# Altium PCB Led_Circuit.PcbDoc
Units mm, origin at the board's own origin, x right, y up, seen from the top; angles counter-clockwise.
Board outline 31.37 x 14.99 mm, 2 copper layers (Top Layer, Bottom Layer); 6 components, 6 nets, 16 pads, 3 vias.
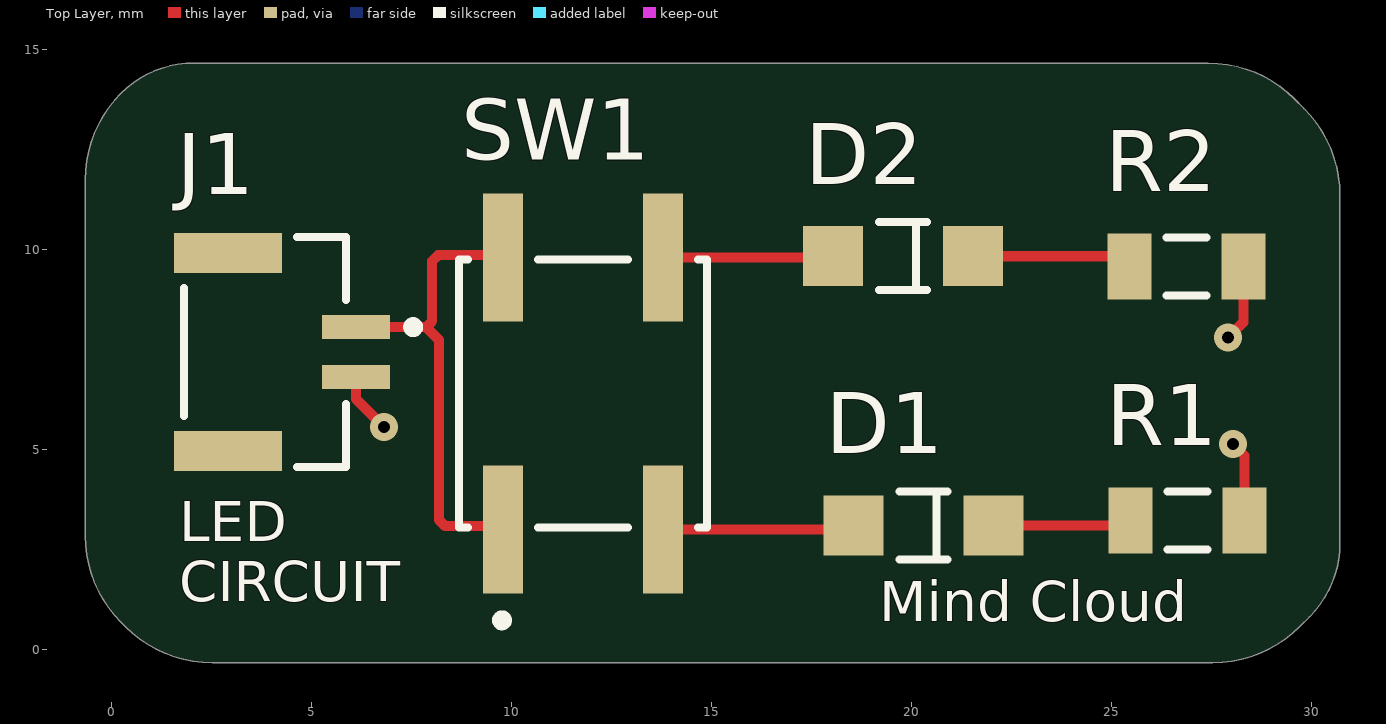
[diagram p0: Top Layer view]
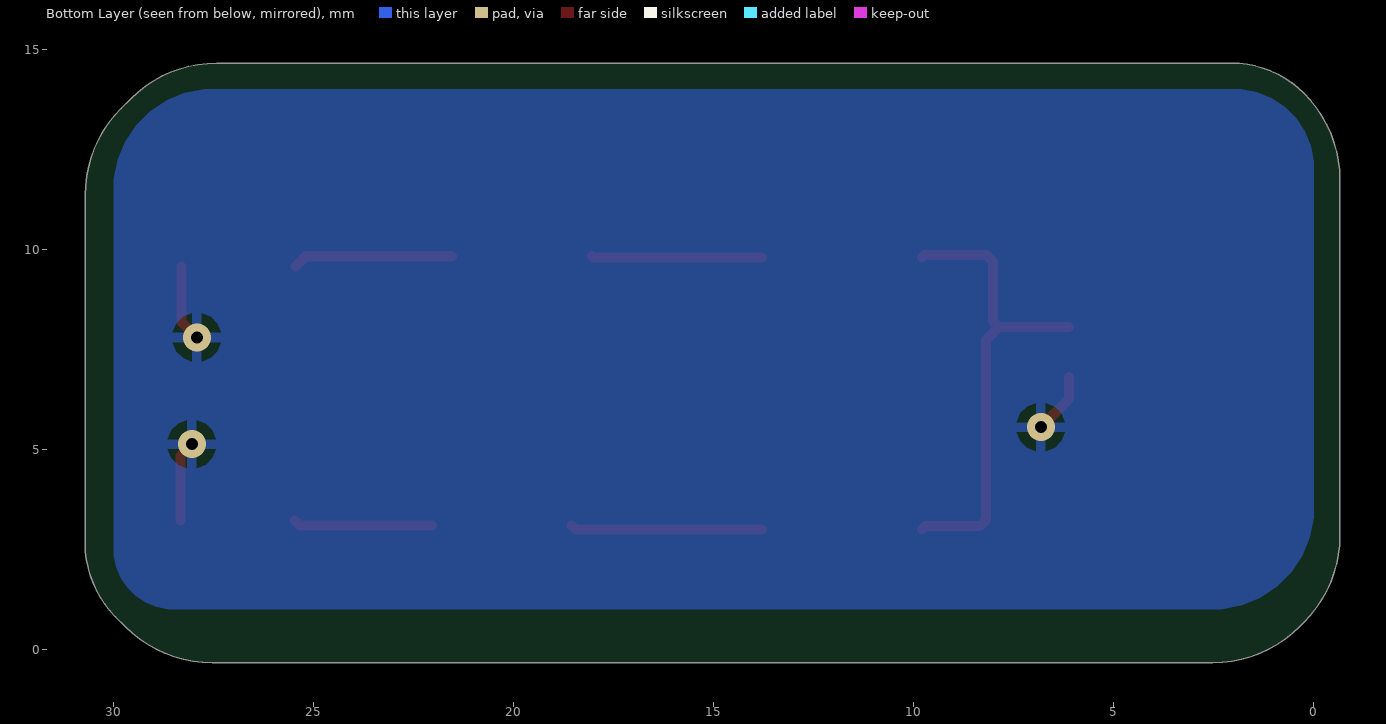
[diagram p1: Bottom Layer view, seen from below]
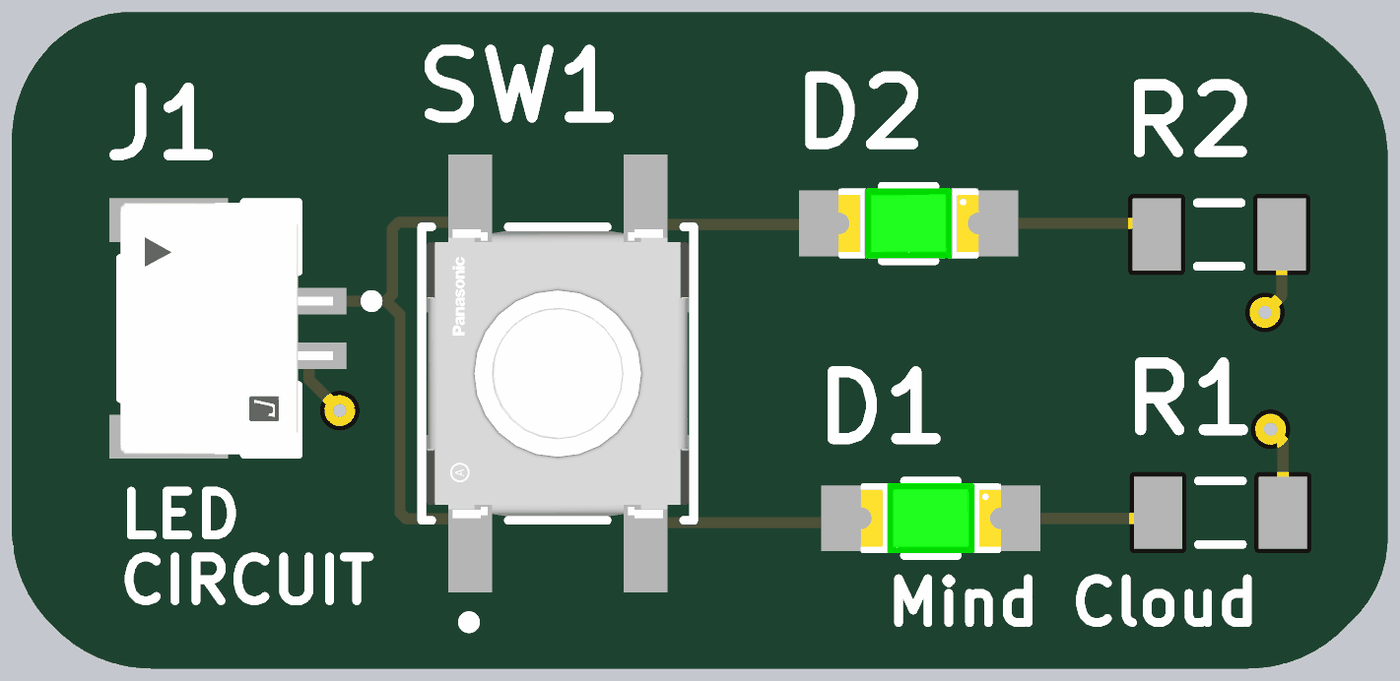
[diagram p2: 3D render of the assembled board from above, using the file's embedded part models]

## Layer stack, top to bottom
Top Solder: solder mask 0.0102, Solder Resist, Dk 3.5
Top Layer: signal copper 0.0356
Dielectric 1: dielectric 0.32, FR-4, Dk 4.8
Bottom Layer: signal copper 0.0356
Bottom Solder: solder mask 0.0102, Solder Resist, Dk 3.5

## Board outline
-0.65,2.838 ccw(c2.416,2.838) 0.248,0.67 0.357,0.561 ccw(c2.525,2.729) 2.525,-0.337 27.544,-0.337 ccw(c27.544,2.729) 29.712,0.561 29.957,0.806 ccw(c28.117,2.646) 30.719,2.646 30.719,11.347 ccw(c27.653,11.347) 29.821,13.515 29.576,13.76 ccw(c27.43,11.614) 27.43,14.649 2.066,14.649 ccw(c2.066,12.078) 0.248,13.896 ccw(c2.416,11.728) -0.65,11.728

## Design rules (kind name [scope] priority, off if disabled: settings)
Clearance [All] p1: gap=0.254 ignorepadtopadclearanceinfootprint=FALSE
PolygonConnect [All] p1: connectstyle=Relief reliefconductorwidth=0.254 reliefentries=4 polygonreliefangle="90 Angle" airgapwidth=0.254
RoutingVias [All] p1: holewidth=0.711 width=1.27 viastyle="Through Hole" minholewidth=0.711 minwidth=1.27 maxholewidth=0.711 maxwidth=1.27
SolderMaskExpansion [All] p1: expansion=0.102 istentingtop=FALSE
SupplyNets "Schematic Supply Nets_1" [InNet('GND')] p1: voltage=0.000
SupplyNets "Schematic Supply Nets" [InNet('+5')] p2: voltage=0.000
Width [All] p1: maxlimit=0.254 minlimit=0.254 preferedwidth=0.254
30 further rules are at their usual default settings.

## Components (designator, comment, footprint, x,y, rotation, side; value= is the part's Value field where it differs from the comment)
D1 "HSMG-C150" FP-HSMG-C150-MFG 20.305,3.092 r180 top
D2 "HSMG-C150" FP-HSMG-C150-MFG 19.797,9.823 r180 top
J1 "SM02B-GHS-TB(LF)(SN)" FP-SM02B-GHS-TB_LF_SN-MFG 3.85,7.425 r270 top
R1 "ERJ8CWFR018V" RESC3216X70X50NL05T20 26.909,3.219 r180 top value=220
R2 "ERJ8CWFR018V" RESC3216X70X50NL05T20 26.881,9.569 r180 top value=220
SW1 "EVQ-Q2P03W" FP-EVQ-Q2P03W-MFG 11.796,6.394 r90 top

## Footprints (in the part's own frame and the unit in brackets; to place one, negate y for a bottom-side part, rotate by r counter-clockwise, add the part's x,y. Pads: shape width x height; smd on the part's side, far side on the other; paste and mask are expansions set on the pad)
FP-EVQ-Q2P03W-MFG [mm]
  rect 3.2x1 smd paste+0 mask+0: A(-3.4,2) A'(3.4,2) B(-3.4,-2) B'(3.4,-2)
  silkscreen extent -5.8,-3.1 3.35,3.1, body extent -5.1,-3.2 5.1,3.2, height 0.25
FP-HSMG-C150-MFG [mm]
  rect 1.5x1.5 smd paste+0 mask+0: 1(-1.75,0) 2(1.75,0)
  silkscreen extent -0.6,-0.85 0.6,0.85, body extent -2.6,-0.95 2.6,0.95, height 0.25
FP-SM02B-GHS-TB_LF_SN-MFG [mm]
  rect 0.6x1.7 smd paste+0 mask+0: 1(-0.625,2.275) 2(0.625,2.275)
  rect 1x2.7 smd paste+0 mask+0: 3(-2.475,-0.925) 4(2.475,-0.925)
  silkscreen extent -2.88,-2.02 2.88,3.83, body extent -3.08,-2.37 3.08,3.22, height 0.25
RESC3216X70X50NL05T20 [mm] "Chip Resistor, 2-Leads, Body 3.20x1.60mm, IPC Medium Density"
  rect 1.1x1.65 smd: 1(-1.425,0) 2(1.425,0)
  silkscreen extent -0.5,-0.72 0.5,0.72, body extent -1.63,-0.82 1.62,0.82, height 0.7

## Part data
D1 D2: library part CMP-2000-05061-2, "LED GREEN DIFFUSED 1206 SMD", Colour=Green, Forward Current=20mA, Forward Voltage=2.2V, Manufacturer=Broadcom, Max Junction Temp=+95°C, Power Dissipation=65mW, Reverse Voltage=5V, Temperature="-40°C to +85°C", Temperature Range High=+85°C, Temperature Range Low=-40°C, Automotive=No, Category=Diode, ComponentLink2Description=Datasheet, ComponentLink2URL=https://docs.broadcom.com/docs/AV02-0551EN, Device Class L1=Optoelectronics, Device Class L2=LEDs, Device Class L3=unset, Digikey Description="LED GREEN DIFFUSED 1206 SMD", Height=1.2mm, Ipc Land Pattern Name=DIOCP320160X55, Lead Free=Yes, Led Orientation="Top View", Luminous Intensity=15mcd, Manufacturer Part Number=HSMG-C150, Mouser Description="LED Uni-Color Green 570nm 2-Pin Chip LED T/R", Octopart=https://octopart.com/hsmg-c150-broadcom-71131304, Package=HSMG-C150, Peak Emmision Wavelength=570nm, RoHS=TRUE, Viewing Angle=170°, Wavelength=572nm
J1: library part CMP-2000-07076-2, "CONN HEADER SMD R/A 2POS 1.25MM", Color=Natural, Current Rating=1A, Package Quantity=2500, Voltage Rating=50V, Connector Type="Outer Shroud Contact", Contact Material=Bronze, Contact Plating=Tin, Contact Type="Male Pin", Fastening Type=Latch, Housing Color=Natural, Housing Material=Nylon, Lead Free="Lead Free", Mount="Surface Mount", Number of Contacts=2, Number of Positions=2, Number of Rows=1, Orientation="Right Angle", Packaging="Tape and Reel", Pitch=0.049inch, Series=GH, Termination=Solder
R1 R2: library part CMP-2003-00792-1, Manufacturer=Panasonic, Part Number=ERJ8CWFR018V
SW1: library part CMP-05618-000082-1, "SWITCH TACTILE SPST-NO 0.02A 15V", Actuator Color=White, Case/Package=SMD/SMT, Contact Current Rating=20mA, Contact Resistance=100mR, Max Operating Temperature=85°C, Max Voltage Rating (DC)=15V, Min Operating Temperature=-40°C, Operating Force=1.6N, Package Quantity=1, Voltage Rating (AC)=250V, Actuator Length=1.3mm, Actuator Type=Standard, Body Depth=6mm, Color=White, Current Rating=20mA, Depth=6.6mm, Electrical Life=1000000Cycles, Height=3.1mm, Illumination Type=Non-Illuminated, Lead Free="Lead Free", Length=6mm, Max Current Rating=20mA, Mechanical Life=1000000Cycles, Mount="Surface Mount", Number of Poles=1, Orientation=Straight, Packaging="Tape and Reel", Radiation Hardening=No, Series=EVQQ2, Size=1.8mm, Switch Function=Off-Mom, Switch Travel=0.25mm, Termination=SMD/SMT, Thickness=1.8mm, Throw Configuration=SPST, Voltage Rating (DC)=15V, Width=6.5mm

## Via types
v1: diameter 0.7, hole 0.3, Top Layer to Bottom Layer, 3 vias

## Nets (pads, with @x,y where several pads share a name; then routed paths per layer and width w, separated by ;. In a path a pad name is that pad's centre, name@x,y a point inside that pad or via, vN(x,y) a via of type N, cw(c..) or ccw(c..) an arc to the next point about the centre after c; other vN are vias at no path point)
+5: J1.1 SW1.A SW1.A' | length 12
  Top Layer w0.254: J1.1 7.875,8.05 ; 8.125,7.8 7.875,8.05 ; 8.126,7.8 8.2,7.726 8.2,3.224 8.349,3.075 9.715,3.075 SW1.A ; SW1.A' 9.74,9.85 8.174,9.85 8.025,9.701 8.025,8.2 7.875,8.05
GND: J1.2 R1.1 R2.1 | length 5.5
  Top Layer w0.254: J1.2 6.125,6.25 v1(6.825,5.55) ; v1(27.925,7.791) 28.306,8.172 R2.1 ; v1(28.052,5.124) 28.334,4.842 R1.1
NetD1_1: D1.1 R1.2 | length 3.5
  Top Layer w0.254: D1.1 25.357,3.092 R1.2
NetD1_2: D1.2 SW1.B | length 4.8
  Top Layer w0.254: SW1.B 18.457,2.994 D1.2
NetD2_1: D2.1 R2.2 | length 4
  Top Layer w0.254: D2.1 25.202,9.823 R2.2
NetD2_2: D2.2 SW1.B' | length 4.3
  Top Layer w0.254: SW1.B' 18.018,9.794 D2.2
pads on no net: J1.3 J1.4

## Polygon pours and split planes (outlines as drawn)
GND on Bottom Layer "GND_L02_P005" (solid, pour order 5): 0,12 cw(c2,12) 2,14 27.5,14 cw(c27.5,11.5) 30,11.5 30,2.5 cw(c28.5,2.5) 28.5,1 2.54,1 cw(c2.54,3.54) 0,3.54

## Silkscreen, mask and mechanical layers (free items; w line width, h text height)
Top Overlay:
  text "LED" at 1.7,2.7 h1
  text "CIRCUIT" at 1.7,1.2 h1
  text "Mind Cloud" at 19.2,0.7 h1
Mechanical 1:
  lines w0.254: -0.65,2.838 ccw(c2.416,2.838) 0.248,0.67 0.357,0.561 ccw(c2.525,2.729) 2.525,-0.337 27.544,-0.337 ccw(c27.544,2.729) 29.712,0.561 29.957,0.806 ccw(c28.117,2.646) 30.719,2.646 30.719,11.347 ccw(c27.653,11.347) 29.821,13.515 29.576,13.76 ccw(c27.43,11.614) 27.43,14.649 2.066,14.649 ccw(c2.066,12.078) 0.248,13.896 ccw(c2.416,11.728) -0.65,11.728 -0.65,6.775 -0.65,2.838